# Altium PCB Signal_Integrity_2L.PcbDoc (part 1 of 2)
Units mm, origin at the board's own origin, x right, y up, seen from the top; angles counter-clockwise.
Board outline 110 x 260 mm, 2 copper layers (Top Layer 1, Bottom Layer 1), stack 1.6 mm thick; 48 components, 38 nets, 216 pads, 2708 vias.
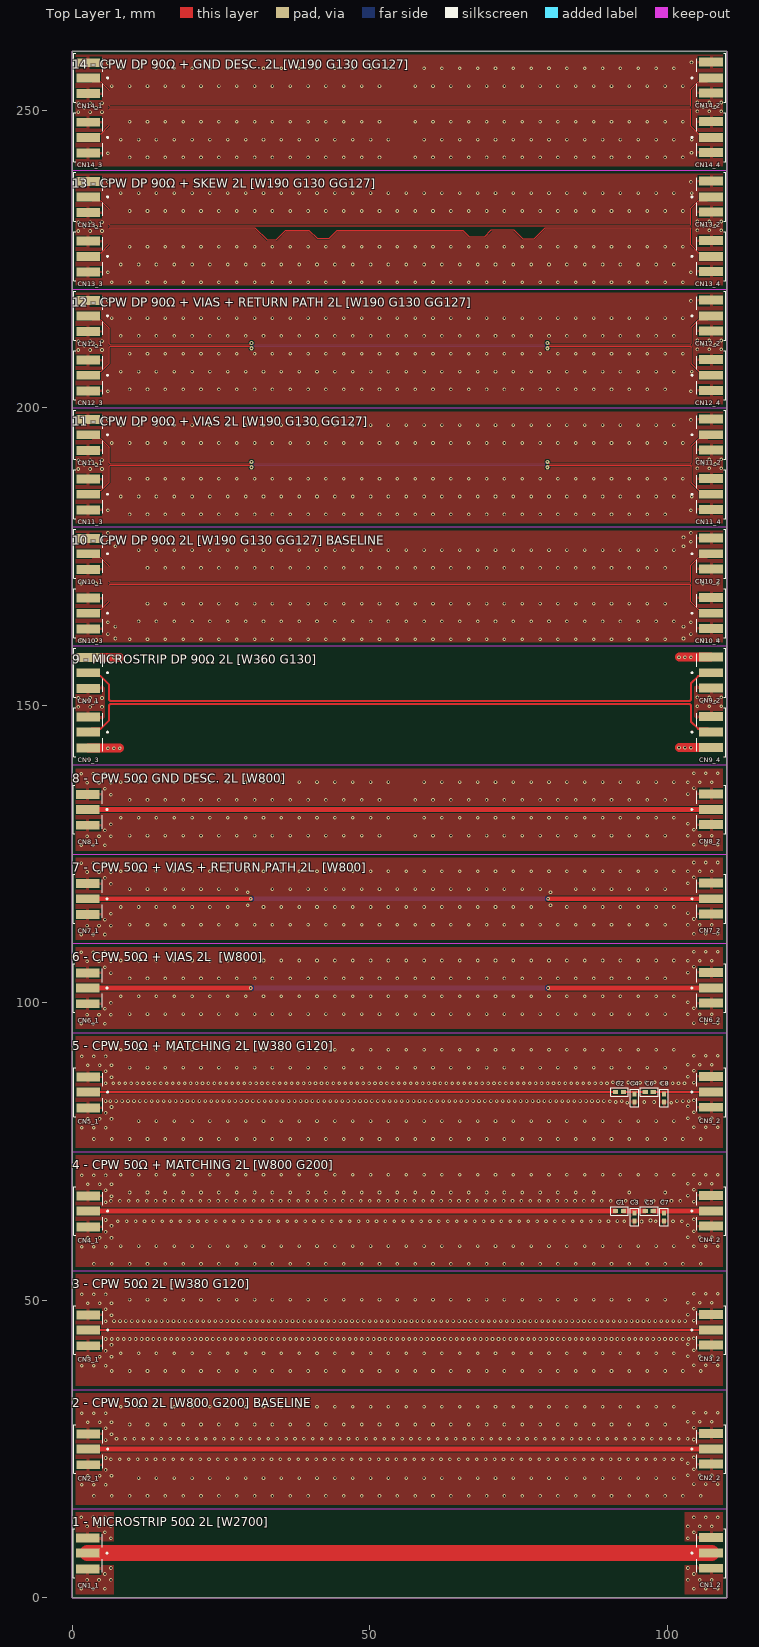
[diagram p0: Top Layer 1 view]
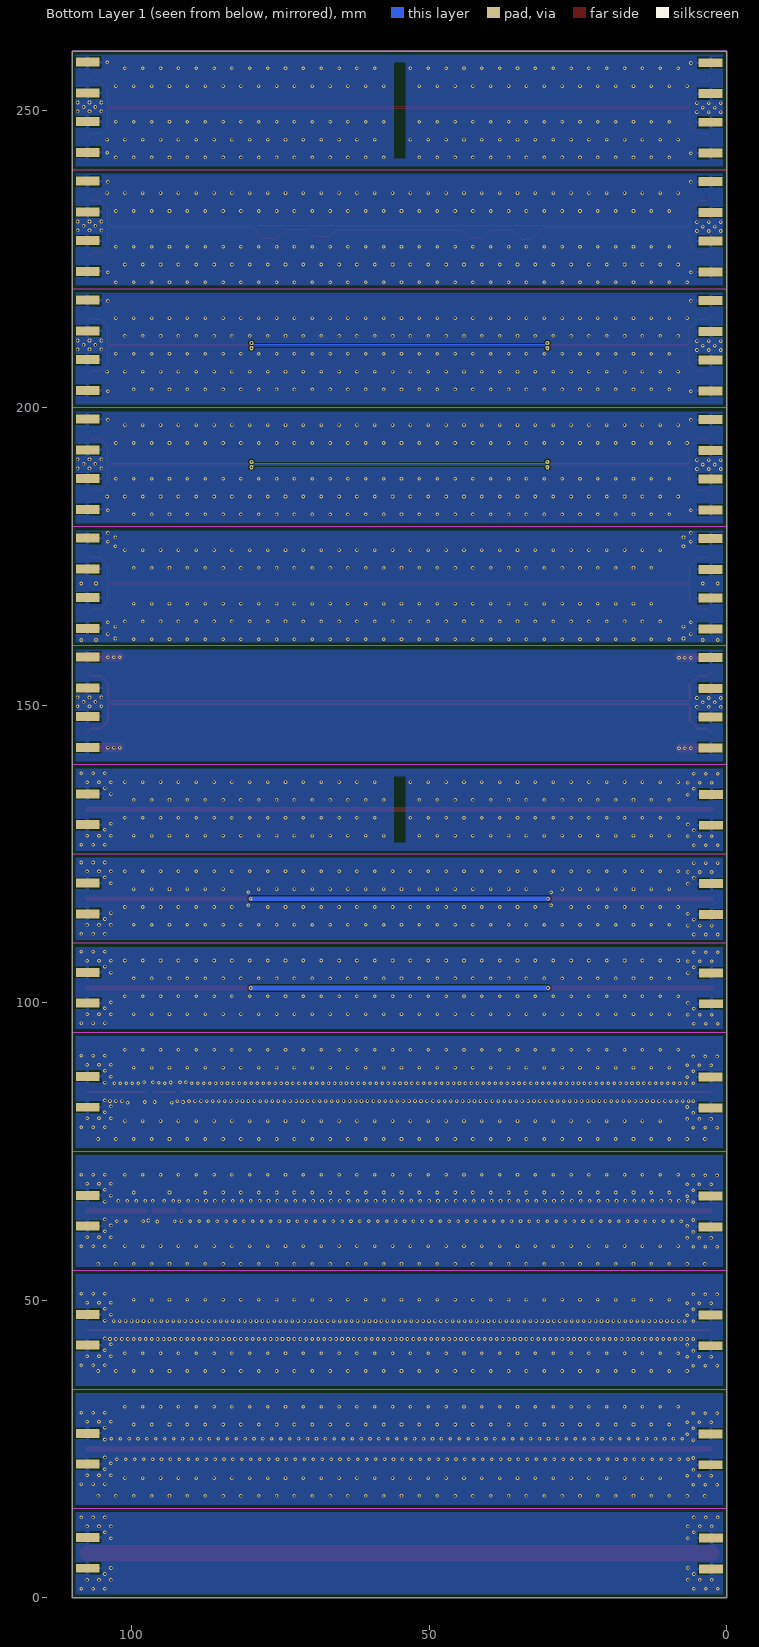
[diagram p1: Bottom Layer 1 view, seen from below]
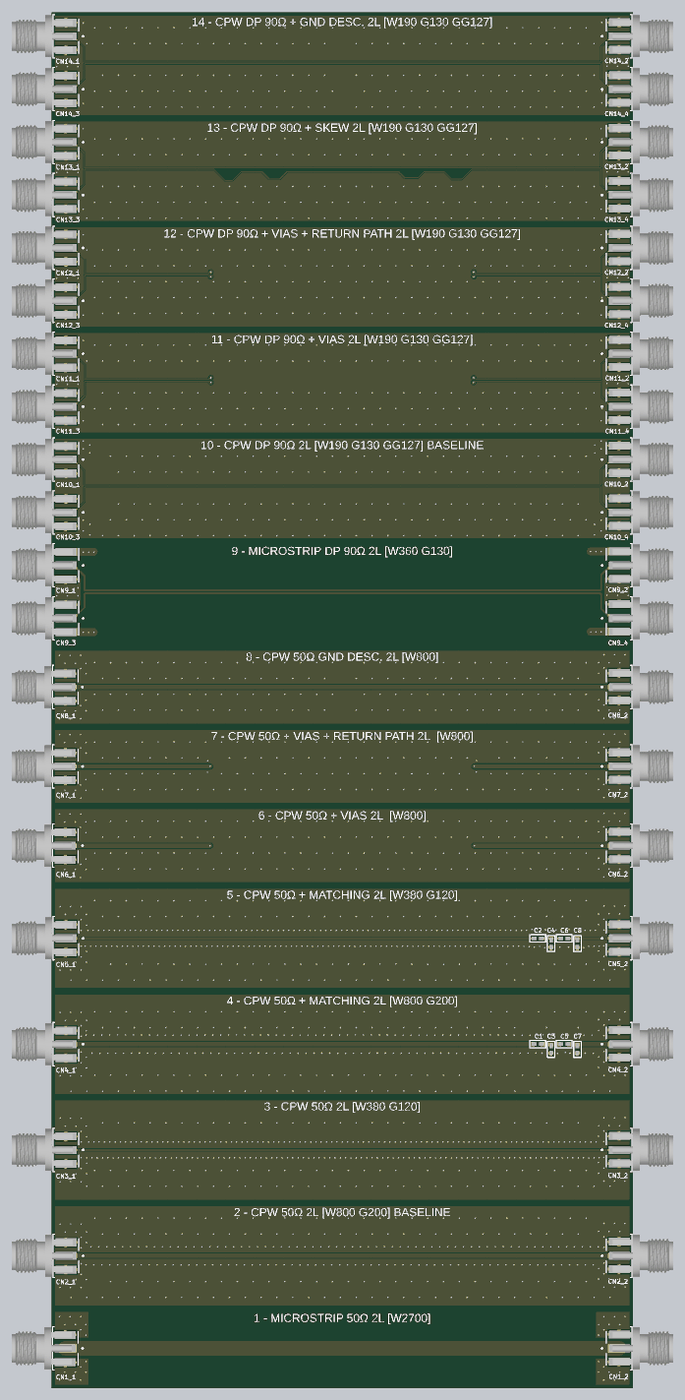
[diagram p3: 3D render of the assembled board from above, using the file's embedded part models]

## Layer stack, top to bottom
Top Solder: solder mask 0.0305, Solder Resist, Dk 3.8
Top Layer 1: signal copper 0.035
Dielectric 1: core 1.53, FR-4, Dk 4.6
Bottom Layer 1: signal copper 0.035
Bottom Solder: solder mask 0.0305, Solder Resist, Dk 3.8

## Board outline
0,0 0,260 110,260 110,0

## Design rules (kind name [scope] priority, off if disabled: settings)
Clearance Clearance_KO [OnLayer('Keep-Out Layer')] p1: gap=0.5 ignorepadtopadclearanceinfootprint=FALSE
Clearance Clearance_SC50_G120 [InNetClass('SC50_G120')] p2: gap=0.2 ignorepadtopadclearanceinfootprint=FALSE except(0.12: Arc-Fill Arc-Poly Arc-Region Track-Fill Track-Poly Track-Region)
Clearance Clearance_DP90 [InDifferentialPairClass('DP90') or InDifferentialPairClass('DPC90')] p3: gap=0.2 ignorepadtopadclearanceinfootprint=FALSE except(0.12: Arc-Arc Arc-Track Arc-Fill Arc-Poly Arc-Region Track-Track Track-Fill Track-Poly Track-Region)
Clearance [All] p4: gap=0.2 ignorepadtopadclearanceinfootprint=FALSE except(0.5: Fill-Fill Fill-Poly Fill-Region Poly-Poly Poly-Region Region-Region)
DiffPairsRouting DiffPairsRouting_DC90 [InDifferentialPairClass('DPC90')] p1: maxlimit=0.13 minlimit=0.13 mostfreqgap=0.13 toplayer_minwidth=0.19 toplayer_maxwidth=0.19 toplayer_prefwidth=0.19 bottomlayer_minwidth=0.19 bottomlayer_maxwidth=0.19 bottomlayer_prefwidth=0.19 impedanceprofiledriven=TRUE impedanceprofileid={4EF72ABD-D41F-48C9-AA84-232B5FCD5662} impedanceprofilevalue=90.000000 maxuncoupledlength=12.7
DiffPairsRouting DiffPairsRouting_DP90 [InDifferentialPairClass('DP90')] p2: maxlimit=0.13 minlimit=0.13 mostfreqgap=0.13 toplayer_minwidth=0.36 toplayer_maxwidth=0.36 toplayer_prefwidth=0.36 bottomlayer_minwidth=0.36 bottomlayer_maxwidth=0.36 bottomlayer_prefwidth=0.36 impedanceprofiledriven=TRUE impedanceprofileid={4D052417-7419-4060-914B-08419BBAABC2} impedanceprofilevalue=90.000000 maxuncoupledlength=12.7
Height [All] p1: minheight=0 maxheight=40 prefheight=12.7
HoleSize [All] p1: absolutevalues=TRUE maxlimit=5 minlimit=0.2 maxpercent=80.000 minpercent=20.000
MinimumSolderMaskSliver [All] p1: minsoldermaskwidth=0.12
PolygonConnect [All] p1: thpad.connectstyle=Relief thpad.reliefconductorwidth=0.254 thpad.reliefentries=4 thpad.polygonreliefangle="90 Angle" thpad.airgapwidth=0.254 smdpad.connectstyle=Relief smdpad.reliefconductorwidth=0.5 smdpad.reliefentries=4 smdpad.polygonreliefangle="90 Angle" smdpad.airgapwidth=0.254 via.connectstyle=Direct via.reliefconductorwidth=0.254 via.reliefentries=4 via.polygonreliefangle="90 Angle" via.airgapwidth=0.254
RoutingVias [All] p1: holewidth=0.3 width=0.6 viastyle="Through Hole" minholewidth=0.2 minwidth=0.6 maxholewidth=0.5 maxwidth=1
SilkToSilkClearance [All] p1: silktosilkclearance=0.127
SilkToSolderMaskClearance [IsPad] p1: minsilkscreentomaskgap=0.127 clearancetoexposedcopper=TRUE
SolderMaskExpansion SolderMaskExpansion_Tented [IsVia] p1: expansion=0.102 istentingtop=TRUE
SolderMaskExpansion [All] p2: expansion=0.102 istentingtop=FALSE
SupplyNets "Schematic Supply Nets_7" [InNet('GND14')] p1: voltage=0.000
SupplyNets "Schematic Supply Nets_13" [InNet('GND10')] p2: voltage=0.000
SupplyNets "Schematic Supply Nets_12" [InNet('GND13')] p3: voltage=0.000
SupplyNets "Schematic Supply Nets_11" [InNet('GND4')] p4: voltage=0.000
SupplyNets "Schematic Supply Nets_10" [InNet('GND5')] p5: voltage=0.000
SupplyNets "Schematic Supply Nets_9" [InNet('GND1')] p6: voltage=0.000
SupplyNets "Schematic Supply Nets_8" [InNet('GND3')] p7: voltage=0.000
SupplyNets "Schematic Supply Nets_6" [InNet('GND12')] p8: voltage=0.000
SupplyNets "Schematic Supply Nets_5" [InNet('GND2')] p9: voltage=0.000
SupplyNets "Schematic Supply Nets_4" [InNet('GND7')] p10: voltage=0.000
SupplyNets "Schematic Supply Nets_3" [InNet('GND11')] p11: voltage=0.000
SupplyNets "Schematic Supply Nets_2" [InNet('GND8')] p12: voltage=0.000
SupplyNets "Schematic Supply Nets_1" [InNet('GND9')] p13: voltage=0.000
SupplyNets "Schematic Supply Nets" [InNet('GND6')] p14: voltage=0.000
Width Width_S50 [InNetClass('S50')] p1: maxlimit=2.7 minlimit=2.7 preferedwidth=2.7 impedanceprofiledriven=TRUE impedanceprofileid={85BB407E-ACC5-421C-8E24-185C8C1FA9EB} impedanceprofilevalue=50.000000 minimp=50.000000 maximp=50.000000 favimp=50.000000
Width Width_SC50_G200 [InNetClass('SC50')] p2: maxlimit=0.8 minlimit=0.8 preferedwidth=0.8 impedanceprofiledriven=TRUE impedanceprofileid={B37FB097-429D-4CF1-A0C8-09DB4BF85B47} impedanceprofilevalue=50.000000 minimp=50.000000 maximp=50.000000 favimp=50.000000
Width Width_SC50_G120 [InNetClass('SC50_G120')] p3: maxlimit=0.38 minlimit=0.38 preferedwidth=0.38 impedanceprofiledriven=TRUE impedanceprofileid={979D10FC-C7C2-44BE-B72E-80F3B42C48E9} impedanceprofilevalue=50.000000 minimp=50.000000 maximp=50.000000 favimp=50.000000
Width [All] p4: maxlimit=3 minlimit=0.2 preferedwidth=0.2 minimp=50.000000 maximp=50.000000 favimp=50.000000
24 further rules are at their usual default settings.

## Classes and differential pairs
net class SC50_G120: CPW_G120_50OHMS CPW_G120_50OHMS_MATCH NetC2_2 NetC6_2
net class S50: MICROSTRIP_50OHMS
differential pair class DPC90: CPW_90OHMS CPW_90OHMS_GND_DESC CPW_90OHMS_SKEW CPW_90OHMS_VIAS CPW_90OHMS_VIAS_RP
differential pair class DP90: MICROSTRIP_90OHMS MICROSTRIP_90OHMS_GND_DESC MICROSTRIP_90OHMS_SKEW MICROSTRIP_90OHMS_VIAS MICROSTRIP_90OHMS_VIAS_RP
net class SC50: CPW_50OHMS_GND_DESC CPW_50OHMS_VIAS CPW_50OHMS_VIAS_RP CPW_G200_50OHMS CPW_G200_50OHMS_MATCH NetC1_2 NetC5_2
differential pair CPW_90OHMS_VIAS_RP: +CPW_90OHMS_VIAS_RP_P -CPW_90OHMS_VIAS_RP_N
differential pair CPW_90OHMS_VIAS: +CPW_90OHMS_VIAS_P -CPW_90OHMS_VIAS_N
differential pair CPW_90OHMS_SKEW: +CPW_90OHMS_SKEW_P -CPW_90OHMS_SKEW_N
differential pair CPW_90OHMS_GND_DESC: +CPW_90OHMS_GND_DESC_P -CPW_90OHMS_GND_DESC_N
differential pair MICROSTRIP_90OHMS: +MICROSTRIP_90OHMS_P -MICROSTRIP_90OHMS_N
differential pair CPW_90OHMS: +CPW_90OHMS_P -CPW_90OHMS_N

## Components (designator, comment, footprint, x,y, rotation, side; value= is the part's Value field where it differs from the comment)
C1 "CAP SMD 0402" 0402 92,65 r0 top
C2 "CAP SMD 0402" 0402 92,85 r0 top
C3 "CAP SMD 0402" 0402 94.5,64 r90 top
C4 "CAP SMD 0402" 0402 94.5,84 r90 top
C5 "CAP SMD 0402" 0402 97,65 r0 top
C6 "CAP SMD 0402" 0402 97,85 r0 top
C7 "CAP SMD 0402" 0402 99.5,64 r90 top
C8 "CAP SMD 0402" 0402 99.5,84 r90 top
CN1_1 "SMA-KE EDGE" "SMA-KE EDGE" 2.6,7.5 r270 top
CN1_2 "SMA-KE EDGE" "SMA-KE EDGE" 107.4,7.5 r90 top
CN2_1 "SMA-KE EDGE" "SMA-KE EDGE" 2.7,25 r270 top
CN2_2 "SMA-KE EDGE" "SMA-KE EDGE" 107.4,25 r90 top
CN3_1 "SMA-KE EDGE" "SMA-KE EDGE" 2.7,45 r270 top
CN3_2 "SMA-KE EDGE" "SMA-KE EDGE" 107.4,45 r90 top
CN4_1 "SMA-KE EDGE" "SMA-KE EDGE" 2.7,65 r270 top
CN4_2 "SMA-KE EDGE" "SMA-KE EDGE" 107.4,65 r90 top
CN5_1 "SMA-KE EDGE" "SMA-KE EDGE" 2.7,85 r270 top
CN5_2 "SMA-KE EDGE" "SMA-KE EDGE" 107.4,85 r90 top
CN6_1 "SMA-KE EDGE" "SMA-KE EDGE" 2.6,102.5 r270 top
CN6_2 "SMA-KE EDGE" "SMA-KE EDGE" 107.4,102.5 r90 top
CN7_1 "SMA-KE EDGE" "SMA-KE EDGE" 2.6,117.5 r270 top
CN7_2 "SMA-KE EDGE" "SMA-KE EDGE" 107.4,117.5 r90 top
CN8_1 "SMA-KE EDGE" "SMA-KE EDGE" 2.6,132.5 r270 top
CN8_2 "SMA-KE EDGE" "SMA-KE EDGE" 107.4,132.5 r90 top
CN9_1 "SMA-KE EDGE" "SMA-KE EDGE" 2.7,155.5 r270 top
CN9_2 "SMA-KE EDGE" "SMA-KE EDGE" 107.4,155.5 r90 top
CN9_3 "SMA-KE EDGE" "SMA-KE EDGE" 2.7,145.5 r270 top
CN9_4 "SMA-KE EDGE" "SMA-KE EDGE" 107.4,145.5 r90 top
CN10_1 "SMA-KE EDGE" "SMA-KE EDGE" 2.7,175.5 r270 top
CN10_2 "SMA-KE EDGE" "SMA-KE EDGE" 107.4,175.5 r90 top
CN10_3 "SMA-KE EDGE" "SMA-KE EDGE" 2.7,165.5 r270 top
CN10_4 "SMA-KE EDGE" "SMA-KE EDGE" 107.4,165.5 r90 top
CN11_1 "SMA-KE EDGE" "SMA-KE EDGE" 2.7,195.5 r270 top
CN11_2 "SMA-KE EDGE" "SMA-KE EDGE" 107.4,195.5 r90 top
CN11_3 "SMA-KE EDGE" "SMA-KE EDGE" 2.7,185.5 r270 top
CN11_4 "SMA-KE EDGE" "SMA-KE EDGE" 107.4,185.5 r90 top
CN12_1 "SMA-KE EDGE" "SMA-KE EDGE" 2.7,215.5 r270 top
CN12_2 "SMA-KE EDGE" "SMA-KE EDGE" 107.4,215.5 r90 top
CN12_3 "SMA-KE EDGE" "SMA-KE EDGE" 2.7,205.5 r270 top
CN12_4 "SMA-KE EDGE" "SMA-KE EDGE" 107.4,205.5 r90 top
CN13_1 "SMA-KE EDGE" "SMA-KE EDGE" 2.7,235.5 r270 top
CN13_2 "SMA-KE EDGE" "SMA-KE EDGE" 107.4,235.5 r90 top
CN13_3 "SMA-KE EDGE" "SMA-KE EDGE" 2.7,225.5 r270 top
CN13_4 "SMA-KE EDGE" "SMA-KE EDGE" 107.4,225.5 r90 top
CN14_1 "SMA-KE EDGE" "SMA-KE EDGE" 2.7,255.5 r270 top
CN14_2 "SMA-KE EDGE" "SMA-KE EDGE" 107.4,255.5 r90 top
CN14_3 "SMA-KE EDGE" "SMA-KE EDGE" 2.7,245.5 r270 top
CN14_4 "SMA-KE EDGE" "SMA-KE EDGE" 107.4,245.5 r90 top

## Footprints (in the part's own frame and the unit in brackets; to place one, negate y for a bottom-side part, rotate by r counter-clockwise, add the part's x,y. Pads: shape width x height; smd on the part's side, far side on the other; paste and mask are expansions set on the pad)
0402 [mm]
  rect 0.9x0.7 smd: 1(-0.673,0) 2(0.673,0)
  silkscreen extent -1.5,-0.7 1.5,0.7
"SMA-KE EDGE" [mm]
  rect 1.5x4 smd: 1(0,0) 2(-2.54,0) 2(2.64,0)
  rect 1.5x4 smd far side: 2(-2.54,0) 2(2.64,0)
  silkscreen extent -4.1,-2.45 4.1,3.37, body extent -3.97,-10.25 3.97,1.26, height 4.61

## Part data
C1 C2 C3 C4 C5 C6 C7 C8: "0402"
CN1_1 CN1_2 CN2_1 CN2_2 CN3_1 CN3_2 CN4_1 CN4_2 CN5_1 CN5_2 CN6_1 CN6_2 CN7_1 CN7_2 CN8_1 CN8_2 CN9_1 CN9_2 CN9_3 CN9_4 CN10_1 CN10_2 CN10_3 CN10_4 CN11_1 CN11_2 CN11_3 CN11_4 CN12_1 CN12_2 CN12_3 CN12_4 CN13_1 CN13_2 CN13_3 CN13_4 CN14_1 CN14_2 CN14_3 CN14_4: "SMA Connector Receptacle, Female Socket 50Ohm Board Edge, End Launch Solder", Manufacturer_Name="TE Connectivity", Manufacturer_Part_Number=CONSMA020.062-G, Mouser Part Number=712-CONSMA020.062-G, Datasheet Link=https://componentsearchengine.com/Datasheets/1/CONSMA020.062-G.pdf, Geometry.Height=7.92mm, Mouser Price/Stock=https://www.mouser.co.uk/ProductDetail/Linx-Technologies/CONSMA020.062-G?qs=xZ%2FP%252Ba9zWqa7zEs9%2FuMaNQ%3D%3D

## Via types
v1: diameter 0.6, hole 0.3, Top Layer 1 to Bottom Layer 1, tented both sides, 2700 vias
v2: diameter 0.7, hole 0.3, Top Layer 1 to Bottom Layer 1, tented both sides, 8 vias

## Nets (pads, with @x,y where several pads share a name; then routed paths per layer and width w, separated by ;. In a path a pad name is that pad's centre, name@x,y a point inside that pad or via, vN(x,y) a via of type N, cw(c..) or ccw(c..) an arc to the next point about the centre after c; other vN are vias at no path point)
CPW_50OHMS_GND_DESC: CN8_1.1 CN8_2.1 | length 104.8
  Top Layer 1 w0.8: CN8_1.1@2.6,132.5 CN8_2.1@107.4,132.5
CPW_50OHMS_VIAS: CN6_1.1 CN6_2.1 | length 104.8
  Top Layer 1 w0.8: CN6_1.1@2.6,102.5 v1(30,102.5) ; v1(80,102.5) CN6_2.1@107.4,102.5
  Bottom Layer 1 w0.8: v1(30,102.5) v1(80,102.5)
CPW_50OHMS_VIAS_RP: CN7_1.1 CN7_2.1 | length 104.8
  Top Layer 1 w0.8: CN7_1.1@2.6,117.5 v1(30,117.5) ; v1(80,117.5) CN7_2.1@107.4,117.5
  Bottom Layer 1 w0.8: v1(30,117.5) v1(80,117.5)
CPW_90OHMS_GND_DESC_N: CN14_3.1 CN14_4.1 | length 112
  Top Layer 1 w0.19: CN14_3.1@2.7,245.5 3.337,246.137 4.837,246.137 6.2,247.5 6.2,250.229 6.311,250.34 103.889,250.34 104,250.229 104,247.4 105.263,246.137 106.763,246.137 CN14_4.1@107.4,245.5
CPW_90OHMS_GND_DESC_P: CN14_1.1 CN14_2.1 | length 111.9
  Top Layer 1 w0.19: CN14_1.1@2.7,255.5 3.355,254.845 4.755,254.845 6.2,253.4 6.2,250.771 6.311,250.66 103.889,250.66 104,250.771 104,253.6 105.263,254.863 106.763,254.863 CN14_2.1@107.4,255.5
CPW_90OHMS_N: CN10_3.1 CN10_4.1 | length 112
  Top Layer 1 w0.19: CN10_3.1@2.7,165.5 3.337,166.137 4.837,166.137 6.2,167.5 6.2,170.229 6.311,170.34 103.889,170.34 104,170.229 104,167.4 105.263,166.137 106.763,166.137 CN10_4.1@107.4,165.5
CPW_90OHMS_P: CN10_1.1 CN10_2.1 | length 111.9
  Top Layer 1 w0.19: CN10_1.1@2.7,175.5 3.355,174.845 4.755,174.845 6.2,173.4 6.2,170.771 6.311,170.66 103.889,170.66 104,170.771 104,173.6 105.263,174.863 106.763,174.863 CN10_2.1@107.4,175.5
CPW_90OHMS_SKEW_N: CN13_3.1 CN13_4.1 | length 117
  Top Layer 1 w0.19: CN13_3.1@2.7,225.5 3.337,226.137 4.837,226.137 6.2,227.5 6.2,230.229 6.311,230.34 30.706,230.34 32.796,228.25 34.271,228.25 35.921,229.9 39.772,229.9 41.147,228.525 43.173,228.525 44.548,229.9 65.652,229.9 66.777,228.775 69.303,228.775 70.478,229.95 74.229,229.95 75.704,228.475 77.629,228.475 79.494,230.34 103.889,230.34 104,230.229 104,227.4 105.263,226.137 106.763,226.137 CN13_4.1@107.4,225.5
CPW_90OHMS_SKEW_P: CN13_1.1 CN13_2.1 | length 111.9
  Top Layer 1 w0.19: CN13_1.1@2.7,235.5 3.355,234.845 4.755,234.845 6.2,233.4 6.2,230.771 6.311,230.66 103.889,230.66 104,230.771 104,233.6 105.263,234.863 106.763,234.863 CN13_2.1@107.4,235.5
CPW_90OHMS_VIAS_N: CN11_3.1 CN11_4.1 | length 112.4
  Top Layer 1 w0.19: CN11_3.1@2.75,185.5 3.387,186.137 4.887,186.137 6.25,187.5 6.25,190.229 6.361,190.34 29.766,190.34 30.056,190.05 v2(30.133,190.05) ; v2(79.867,190.05) 79.944,190.05 80.234,190.34 103.939,190.34 104.05,190.229 104.05,187.4 105.313,186.137 106.813,186.137 CN11_4.1@107.45,185.5
  Bottom Layer 1 w0.19: v2(30.133,190.05) 30.209,190.05 30.499,190.34 79.501,190.34 79.791,190.05 v2(79.867,190.05)
CPW_90OHMS_VIAS_P: CN11_1.1 CN11_2.1 | length 112.4
  Top Layer 1 w0.19: CN11_1.1@2.75,195.5 3.405,194.845 4.805,194.845 6.25,193.4 6.25,190.771 6.361,190.66 29.766,190.66 30.056,190.95 v2(30.133,190.95) ; v2(79.867,190.95) 79.944,190.95 80.234,190.66 103.939,190.66 104.05,190.771 104.05,193.6 105.313,194.863 106.813,194.863 CN11_2.1@107.45,195.5
  Bottom Layer 1 w0.19: v2(30.133,190.95) 30.209,190.95 30.499,190.66 79.501,190.66 79.791,190.95 v2(79.867,190.95)
CPW_90OHMS_VIAS_RP_N: CN12_3.1 CN12_4.1 | length 112.4
  Top Layer 1 w0.19: CN12_3.1@2.75,205.5 3.387,206.137 4.887,206.137 6.25,207.5 6.25,210.229 6.361,210.34 29.766,210.34 30.056,210.05 v2(30.133,210.05) ; v2(79.867,210.05) 79.944,210.05 80.234,210.34 103.939,210.34 104.05,210.229 104.05,207.4 105.313,206.137 106.813,206.137 CN12_4.1@107.45,205.5
  Bottom Layer 1 w0.19: v2(30.133,210.05) 30.209,210.05 30.499,210.34 79.501,210.34 79.791,210.05 v2(79.867,210.05)
CPW_90OHMS_VIAS_RP_P: CN12_1.1 CN12_2.1 | length 112.4
  Top Layer 1 w0.19: CN12_1.1@2.75,215.5 3.405,214.845 4.805,214.845 6.25,213.4 6.25,210.771 6.361,210.66 29.766,210.66 30.056,210.95 v2(30.133,210.95) ; v2(79.867,210.95) 79.944,210.95 80.234,210.66 103.939,210.66 104.05,210.771 104.05,213.6 105.313,214.863 106.813,214.863 CN12_2.1@107.45,215.5
  Bottom Layer 1 w0.19: v2(30.133,210.95) 30.209,210.95 30.499,210.66 79.501,210.66 79.791,210.95 v2(79.867,210.95)
CPW_G120_50OHMS: CN3_1.1 CN3_2.1 | length 104.7
  Top Layer 1 w0.38: CN3_1.1@2.7,45 CN3_2.1@107.4,45
CPW_G120_50OHMS_MATCH: C2.1 CN5_1.1 | length 88.6
  Top Layer 1 w0.38: CN5_1.1@2.7,85 C2.1@91.327,85
CPW_G200_50OHMS: CN2_1.1 CN2_2.1 | length 104.7
  Top Layer 1 w0.8: CN2_1.1@2.7,25 CN2_2.1@107.4,25
CPW_G200_50OHMS_MATCH: C1.1 CN4_1.1 | length 88.6
  Top Layer 1 w0.8: CN4_1.1@2.7,65 C1.1@91.327,65
GND1: CN1_1.2 CN1_2.2
  other v1: 1.5,1.5 3.5,1.5 5.5,1.5 104.5,1.5 106.5,1.5 108.5,1.5 2.5,3 4.5,3 6.5,3 103.5,3 105.5,3 107.5,3 5.5,4 104.5,4 6.5,5 103.5,5 6.5,10 103.5,10 5.5,11 104.5,11 2.5,12 4.5,12 6.5,12 103.5,12 105.5,12 107.5,12 1.5,13.5 3.5,13.5 5.5,13.5 104.5,13.5 106.5,13.5 108.5,13.5
GND2: CN2_1.2 CN2_2.2
  other v1: 3.65,17.121 6.65,17.121 9.65,17.121 12.65,17.121 15.65,17.121 18.65,17.121 21.65,17.121 24.65,17.121 27.65,17.121 30.65,17.121 33.65,17.121 36.65,17.121 39.65,17.121 42.65,17.121 45.65,17.121 48.65,17.121 51.65,17.121 54.65,17.121 57.65,17.121 60.65,17.121 63.65,17.121 66.65,17.121 69.65,17.121 72.65,17.121 75.65,17.121 78.65,17.121 81.65,17.121 84.65,17.121 87.65,17.121 90.65,17.121 93.65,17.121 96.65,17.121 99.65,17.121 102.65,17.121 105.65,17.121 1.6,19 3.6,19 5.6,19 104.5,19.1 106.5,19.1 108.5,19.1 11.15,20.121 14.15,20.121 17.15,20.121 20.15,20.121 23.15,20.121 26.15,20.121 29.15,20.121 32.15,20.121 35.15,20.121 38.15,20.121 41.15,20.121 44.15,20.121 47.15,20.121 50.15,20.121 53.15,20.121 56.15,20.121 59.15,20.121 62.15,20.121 65.15,20.121 68.15,20.121 71.15,20.121 74.15,20.121 77.15,20.121 80.15,20.121 83.15,20.121 86.15,20.121 89.15,20.121 92.15,20.121 95.15,20.121 98.15,20.121 101.15,20.121 2.6,20.5 4.6,20.5 6.6,20.5 103.5,20.6 105.5,20.6 107.5,20.6 5.6,21.5 104.5,21.6 103.5,22.6 6.494,23.281 7.994,23.281 9.494,23.281 10.994,23.281 12.494,23.281 13.994,23.281 15.494,23.281 16.994,23.281 18.494,23.281 19.994,23.281 21.494,23.281 22.994,23.281 24.494,23.281 25.994,23.281 27.494,23.281 28.994,23.281 30.494,23.281 31.994,23.281 33.494,23.281 34.994,23.281 36.494,23.281 37.994,23.281 39.494,23.281 40.994,23.281 42.494,23.281 43.994,23.281 45.494,23.281 46.994,23.281 48.494,23.281 49.994,23.281 51.494,23.281 52.994,23.281 54.494,23.281 55.994,23.281 57.494,23.281 58.994,23.281 60.494,23.281 61.994,23.281 63.494,23.281 64.994,23.281 66.494,23.281 67.994,23.281 69.494,23.281 70.994,23.281 72.494,23.281 73.994,23.281 75.494,23.281 76.994,23.281 78.494,23.281 79.994,23.281 81.494,23.281 82.994,23.281 84.494,23.281 85.994,23.281 87.494,23.281 88.994,23.281 90.494,23.281 91.994,23.281 93.494,23.281 94.994,23.281 96.494,23.281 97.994,23.281 99.494,23.281 100.994,23.281 102.494,23.281 5.6,23.5 104.5,23.6 5.6,26.5 104.5,26.6 7.445,26.719 8.945,26.719 10.445,26.719 11.945,26.719 13.445,26.719 14.945,26.719 16.445,26.719 17.945,26.719 19.445,26.719 20.945,26.719 22.445,26.719 23.945,26.719 25.445,26.719 26.945,26.719 28.445,26.719 29.945,26.719 31.445,26.719 32.945,26.719 34.445,26.719 35.945,26.719 37.445,26.719 38.945,26.719 40.445,26.719 41.945,26.719 43.445,26.719 44.945,26.719 46.445,26.719 47.945,26.719 49.445,26.719 50.945,26.719 52.445,26.719 53.945,26.719 55.445,26.719 56.945,26.719 58.445,26.719 59.945,26.719 61.445,26.719 62.945,26.719 64.445,26.719 65.945,26.719 67.445,26.719 68.945,26.719 70.445,26.719 71.945,26.719 73.445,26.719 74.945,26.719 76.445,26.719 77.945,26.719 79.445,26.719 80.945,26.719 82.445,26.719 83.945,26.719 85.445,26.719 86.945,26.719 88.445,26.719 89.945,26.719 91.445,26.719 92.945,26.719 94.445,26.719 95.945,26.719 97.445,26.719 98.945,26.719 100.445,26.719 101.945,26.719 103.445,26.719 6.6,27.5 5.6,28.5 104.5,28.6 9.65,29.121 12.65,29.121 15.65,29.121 18.65,29.121 21.65,29.121 24.65,29.121 27.65,29.121 30.65,29.121 33.65,29.121 36.65,29.121 39.65,29.121 42.65,29.121 45.65,29.121 48.65,29.121 51.65,29.121 54.65,29.121 57.65,29.121 60.65,29.121 63.65,29.121 66.65,29.121 69.65,29.121 72.65,29.121 75.65,29.121 78.65,29.121 81.65,29.121 84.65,29.121 87.65,29.121 90.65,29.121 93.65,29.121 96.65,29.121 99.65,29.121 2.6,29.5 4.6,29.5 6.6,29.5 103.5,29.6 105.5,29.6 107.5,29.6 1.6,31 3.6,31 5.6,31 104.5,31.1 106.5,31.1 108.5,31.1 8.15,32.121 11.15,32.121 14.15,32.121 17.15,32.121 20.15,32.121 23.15,32.121 26.15,32.121 29.15,32.121 32.15,32.121 35.15,32.121 38.15,32.121 41.15,32.121 44.15,32.121 47.15,32.121 50.15,32.121 53.15,32.121 56.15,32.121 59.15,32.121 62.15,32.121 65.15,32.121 68.15,32.121 71.15,32.121 74.15,32.121 77.15,32.121 80.15,32.121 83.15,32.121 86.15,32.121 89.15,32.121 92.15,32.121 95.15,32.121 98.15,32.121 101.15,32.121
GND3: CN3_1.2 CN3_2.2
  other v1: 6.65,38.121 9.65,38.121 12.65,38.121 15.65,38.121 18.65,38.121 21.65,38.121 24.65,38.121 27.65,38.121 30.65,38.121 33.65,38.121 36.65,38.121 39.65,38.121 42.65,38.121 45.65,38.121 48.65,38.121 51.65,38.121 54.65,38.121 57.65,38.121 60.65,38.121 63.65,38.121 66.65,38.121 69.65,38.121 72.65,38.121 75.65,38.121 78.65,38.121 81.65,38.121 84.65,38.121 87.65,38.121 90.65,38.121 93.65,38.121 96.65,38.121 99.65,38.121 102.65,38.121 105.65,38.121 1.6,39 3.6,39 5.6,39 104.5,39.1 106.5,39.1 108.5,39.1 2.6,40.5 4.6,40.5 6.6,40.5 103.5,40.6 105.5,40.6 107.5,40.6 8.15,41.121 11.15,41.121 14.15,41.121 17.15,41.121 20.15,41.121 23.15,41.121 26.15,41.121 29.15,41.121 32.15,41.121 35.15,41.121 38.15,41.121 41.15,41.121 44.15,41.121 47.15,41.121 50.15,41.121 53.15,41.121 56.15,41.121 59.15,41.121 62.15,41.121 65.15,41.121 68.15,41.121 71.15,41.121 74.15,41.121 77.15,41.121 80.15,41.121 83.15,41.121 86.15,41.121 89.15,41.121 92.15,41.121 95.15,41.121 98.15,41.121 101.15,41.121 5.6,41.5 104.5,41.6 6.6,42.5 103.5,42.6 5.6,43.5 6.65,43.495 7.65,43.495 8.65,43.495 9.65,43.495 10.65,43.495 11.65,43.495 12.65,43.495 13.65,43.495 14.65,43.495 15.65,43.495 16.65,43.495 17.65,43.495 18.65,43.495 19.65,43.495 20.65,43.495 21.65,43.495 22.65,43.495 23.65,43.495 24.65,43.495 25.65,43.495 26.65,43.495 27.65,43.495 28.65,43.495 29.65,43.495 30.65,43.495 31.65,43.495 32.65,43.495 33.65,43.495 34.65,43.495 35.65,43.495 36.65,43.495 37.65,43.495 38.65,43.495 39.65,43.495 40.65,43.495 41.65,43.495 42.65,43.495 43.65,43.495 44.65,43.495 45.65,43.495 46.65,43.495 47.65,43.495 48.65,43.495 49.65,43.495 50.65,43.495 51.65,43.495 52.65,43.495 53.65,43.495 54.65,43.495 55.65,43.495 56.65,43.495 57.65,43.495 58.65,43.495 59.65,43.495 60.65,43.495 61.65,43.495 62.65,43.495 63.65,43.495 64.65,43.495 65.65,43.495 66.65,43.495 67.65,43.495 68.65,43.495 69.65,43.495 70.65,43.495 71.65,43.495 72.65,43.495 73.65,43.495 74.65,43.495 75.65,43.495 76.65,43.495 77.65,43.495 78.65,43.495 79.65,43.495 80.649,43.495 81.649,43.495 82.649,43.495 83.649,43.495 84.649,43.495 85.649,43.495 86.649,43.495 87.649,43.495 88.649,43.495 89.649,43.495 90.649,43.495 91.649,43.495 92.649,43.495 93.649,43.495 94.649,43.495 95.649,43.495 96.649,43.495 97.649,43.495 98.649,43.495 99.649,43.495 100.649,43.495 101.649,43.495 102.649,43.495 103.649,43.495 104.5,43.6 5.6,46.5 7.025,46.505 8.025,46.505 9.025,46.505 10.025,46.505 11.025,46.505 12.025,46.505 13.025,46.505 14.025,46.505 15.025,46.505 16.025,46.505 17.025,46.505 18.025,46.505 19.025,46.505 20.025,46.505 21.025,46.505 22.025,46.505 23.025,46.505 24.025,46.505 25.025,46.505 26.025,46.505 27.025,46.505 28.025,46.505 29.025,46.505 30.025,46.505 31.025,46.505 32.025,46.505 33.025,46.505 34.025,46.505 35.025,46.505 36.025,46.505 37.025,46.505 38.025,46.505 39.025,46.505 40.025,46.505 41.025,46.505 42.025,46.505 43.025,46.505 44.025,46.505 45.025,46.505 46.025,46.505 47.025,46.505 48.025,46.505 49.025,46.505 50.025,46.505 51.025,46.505 52.025,46.505 53.025,46.505 54.025,46.505 55.025,46.505 56.025,46.505 57.025,46.505 58.025,46.505 59.025,46.505 60.025,46.505 61.025,46.505 62.025,46.505 63.025,46.505 64.025,46.505 65.025,46.505 66.025,46.505 67.025,46.505 68.025,46.505 69.025,46.505 70.025,46.505 71.025,46.505 72.025,46.505 73.025,46.505 74.025,46.505 75.025,46.505 76.025,46.505 77.025,46.505 78.025,46.505 79.025,46.505 80.025,46.505 81.025,46.505 82.025,46.505 83.025,46.505 84.025,46.505 85.025,46.505 86.025,46.505 87.025,46.505 88.025,46.505 89.025,46.505 90.025,46.505 91.025,46.505 92.025,46.505 93.025,46.505 94.025,46.505 95.025,46.505 96.025,46.505 97.025,46.505 98.025,46.505 99.025,46.505 100.025,46.505 101.025,46.505 102.025,46.505 103.025,46.505 104.5,46.6 6.6,47.5 103.5,47.6 5.6,48.5 104.5,48.6 2.6,49.5 4.6,49.5 6.6,49.5 103.5,49.6 105.5,49.6 107.5,49.6 9.65,50.121 12.65,50.121 15.65,50.121 18.65,50.121 21.65,50.121 24.65,50.121 27.65,50.121 30.65,50.121 33.65,50.121 36.65,50.121 39.65,50.121 42.65,50.121 45.65,50.121 48.65,50.121 51.65,50.121 54.65,50.121 57.65,50.121 60.65,50.121 63.65,50.121 66.65,50.121 69.65,50.121 72.65,50.121 75.65,50.121 78.65,50.121 81.65,50.121 84.65,50.121 87.65,50.121 90.65,50.121 93.65,50.121 96.65,50.121 99.65,50.121 1.6,51 3.6,51 5.6,51 104.5,51.1 106.5,51.1 108.5,51.1
GND4: C3.1 C7.1 CN4_1.2 CN4_2.2
  other v1: 3.65,56.121 6.65,56.121 9.65,56.121 12.65,56.121 15.65,56.121 18.65,56.121 21.65,56.121 24.65,56.121 27.65,56.121 30.65,56.121 33.65,56.121 36.65,56.121 39.65,56.121 42.65,56.121 45.65,56.121 48.65,56.121 51.65,56.121 54.65,56.121 57.65,56.121 60.65,56.121 63.65,56.121 66.65,56.121 69.65,56.121 72.65,56.121 75.65,56.121 78.65,56.121 81.65,56.121 84.65,56.121 87.65,56.121 90.65,56.121 93.65,56.121 96.65,56.121 99.65,56.121 102.65,56.121 105.65,56.121 1.6,59 3.6,59 5.6,59 104.5,59.1 106.5,59.1 108.5,59.1 8.15,59.121 11.15,59.121 14.15,59.121 17.15,59.121 20.15,59.121 23.15,59.121 26.15,59.121 29.15,59.121 32.15,59.121 35.15,59.121 38.15,59.121 41.15,59.121 44.15,59.121 47.15,59.121 50.15,59.121 53.15,59.121 56.15,59.121 59.15,59.121 62.15,59.121 65.15,59.121 68.15,59.121 71.15,59.121 74.15,59.121 77.15,59.121 80.15,59.121 83.15,59.121 86.15,59.121 89.15,59.121 92.15,59.121 95.15,59.121 98.15,59.121 101.15,59.121 2.6,60.5 4.6,60.5 6.6,60.5 103.5,60.6 105.5,60.6 107.5,60.6 5.6,61.5 104.5,61.6 6.6,62.5 103.5,62.6 95.712,63.246 7.644,63.281 9.144,63.281 10.644,63.281 12.144,63.281 13.644,63.281 15.144,63.281 16.644,63.281 18.144,63.281 19.644,63.281 21.144,63.281 22.644,63.281 24.144,63.281 25.644,63.281 27.144,63.281 28.644,63.281 30.144,63.281 31.644,63.281 33.144,63.281 34.644,63.281 36.144,63.281 37.644,63.281 39.144,63.281 40.644,63.281 42.144,63.281 43.644,63.281 45.144,63.281 46.644,63.281 48.144,63.281 49.644,63.281 51.144,63.281 52.644,63.281 54.144,63.281 55.644,63.281 57.144,63.281 58.644,63.281 60.144,63.281 61.644,63.281 63.144,63.281 64.644,63.281 66.144,63.281 67.644,63.281 69.144,63.281 70.644,63.281 72.144,63.281 73.644,63.281 75.144,63.281 76.644,63.281 78.144,63.281 79.644,63.281 81.144,63.281 82.644,63.281 84.144,63.281 85.644,63.281 87.144,63.281 88.644,63.281 90.144,63.281 92.796,63.281 98.086,63.281 100.994,63.281 102.494,63.281 91.643,63.318 97.202,63.419 5.6,63.5 104.5,63.6 5.6,66.5 104.5,66.6 92.007,66.631 96.454,66.702 6.51,66.719 8.01,66.719 9.51,66.719 11.01,66.719 12.51,66.719 14.01,66.719 15.51,66.719 17.01,66.719 18.51,66.719 20.01,66.719 21.51,66.719 23.01,66.719 24.51,66.719 26.01,66.719 27.51,66.719 29.01,66.719 30.51,66.719 32.01,66.719 33.51,66.719 35.01,66.719 36.51,66.719 38.01,66.719 39.51,66.719 41.01,66.719 42.51,66.719 44.01,66.719 45.51,66.719 47.01,66.719 48.51,66.719 50.01,66.719 51.51,66.719 53.01,66.719 54.51,66.719 56.01,66.719 57.51,66.719 59.01,66.719 60.51,66.719 62.01,66.719 63.51,66.719 65.01,66.719 66.51,66.719 68.01,66.719 69.51,66.719 71.01,66.719 72.51,66.719 74.01,66.719 75.51,66.719 77.01,66.719 78.51,66.719 80.01,66.719 81.51,66.719 83.01,66.719 84.51,66.719 86.01,66.719 87.51,66.719 89.01,66.719 90.51,66.719 93.03,66.719 94.53,66.719 97.735,66.719 99.235,66.719 100.735,66.719 102.235,66.719 6.6,67.5 103.5,67.6 9.65,68.121 12.65,68.121 15.65,68.121 18.65,68.121 21.65,68.121 24.65,68.121 27.65,68.121 30.65,68.121 33.65,68.121 36.65,68.121 39.65,68.121 42.65,68.121 45.65,68.121 48.65,68.121 51.65,68.121 54.65,68.121 57.65,68.121 60.65,68.121 63.65,68.121 66.65,68.121 69.65,68.121 72.65,68.121 75.65,68.121 78.65,68.121 81.65,68.121 84.65,68.121 87.65,68.121 93.65,68.121 99.65,68.121 5.6,68.5 104.5,68.6 2.6,69.5 4.6,69.5 6.6,69.5 103.5,69.6 105.5,69.6 107.5,69.6 1.6,71 3.6,71 5.6,71 8.15,71.121 11.15,71.121 14.15,71.121 17.15,71.121 20.15,71.121 23.15,71.121 26.15,71.121 29.15,71.121 32.15,71.121 35.15,71.121 38.15,71.121 41.15,71.121 44.15,71.121 47.15,71.121 50.15,71.121 53.15,71.121 56.15,71.121 59.15,71.121 62.15,71.121 65.15,71.121 68.15,71.121 71.15,71.121 74.15,71.121 77.15,71.121 80.15,71.121 83.15,71.121 86.15,71.121 89.15,71.121 92.15,71.121 95.15,71.121 98.15,71.121 101.15,71.121 104.5,71.1 106.5,71.1 108.5,71.1